# EAGLE board schematic01 (EAGLE 8.1.0)
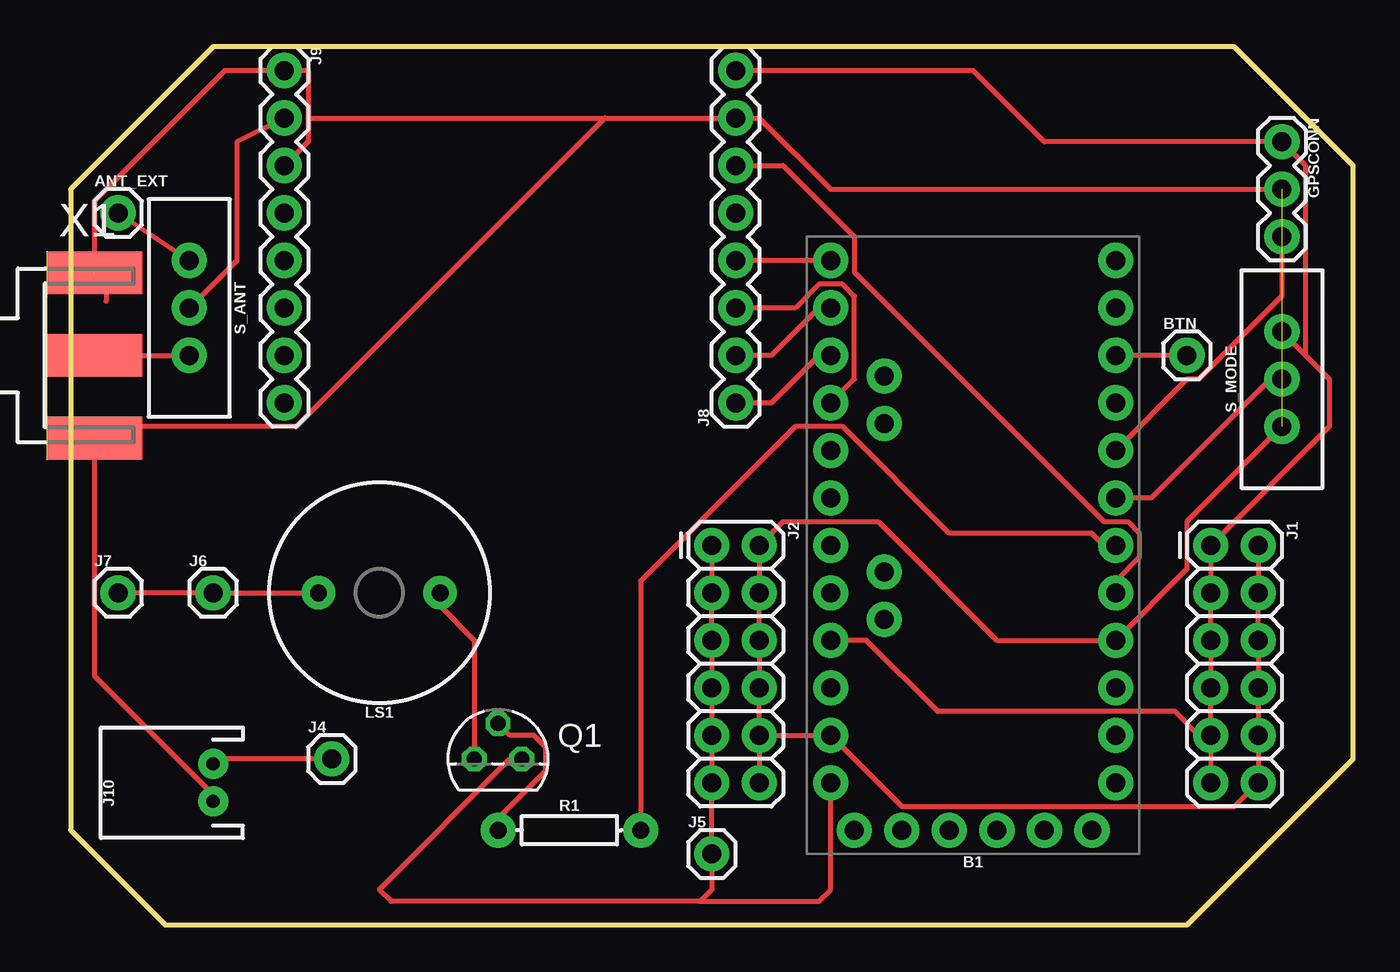
[diagram p0: board, top side]
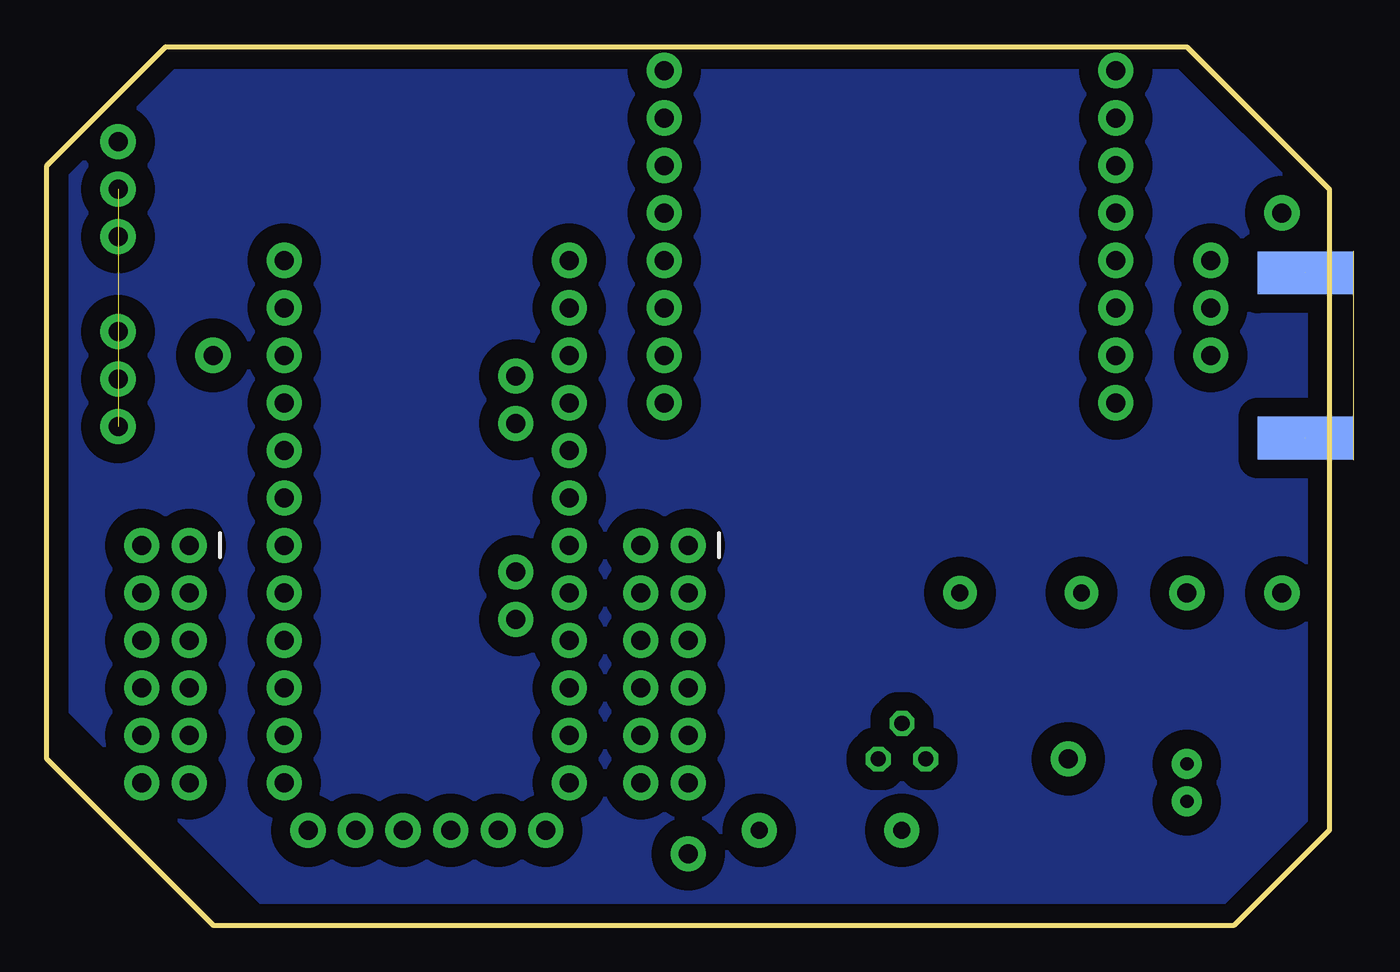
[diagram p1: board, bottom side, seen from below]

Size 68.58 x 46.99 mm. Coordinates in mm from the lower left corner, seen from the top.
Outline: 68.58,8.89 59.69,0 5.08,0 0,5.08 0,39.37 7.62,46.99 62.23,46.99 68.58,40.64 68.58,8.89
Copper layers (1*16): Top 0.035mm / dielectric 1.5mm / Bottom 0.035mm
Design rules "default": minimum track width 10mil, minimum drill 24mil, track to track 8mil, track to pad 8mil, pad to pad 8mil, via to via 8mil, smd to smd 8mil, copper to edge 40mil, drill to drill 8mil, minimum pad ring 10mil, minimum via ring 8mil, stop-mask expansion 4mil, vias tented up to drill 0mil, thermal gap 10mil

## Footprints (pad centres in the part's own frame; a part is rotated, then mirrored left to right if it is on the bottom)
1X01 = drill 1.016 pad 1.88: 1 0,0
ARDUINO_PRO_MINI = drill 1.016 pad 1.88: 1 -7.62,12.7; 2 -7.62,10.16; 3 -7.62,7.62; 4 -7.62,5.08; 5 -7.62,2.54; 6 -7.62,0; 7 -7.62,-2.54; 8 -7.62,-5.08; 9 -7.62,-7.62; 10 -7.62,-10.16; 11 -7.62,-12.7; 12 -7.62,-15.24; 13 7.62,-15.24; 14 7.62,-12.7; 15 7.62,-10.16; 16 7.62,-7.62; 17 7.62,-5.08; 18 7.62,-2.54; 19 7.62,0; 20 7.62,2.54; 21 7.62,5.08; 22 7.62,7.62; 23 7.62,10.16; 24 7.62,12.7; A4 4.763,1.429; A5 4.763,3.969; A6 4.763,-9.049; A7 4.763,-6.509; BLK -6.35,15.24; GND -3.81,15.24; GRN 6.35,15.24; RXI 1.27,15.24; TXO 3.81,15.24; VCC -1.27,15.24
1X03 = drill 1.016 pad 1.88: 1 0,0; 2 2.54,0; 3 5.08,0
2X6 = drill 1.016 pad 1.88: 1 0,0; 2 0,2.54; 3 2.54,0; 4 2.54,2.54; 5 5.08,0; 6 5.08,2.54; 7 7.62,0; 8 7.62,2.54; 9 10.16,0; 10 10.16,2.54; 11 12.7,0; 12 12.7,2.54
1X08 = drill 1.016 pad 1.88: 1 0,0; 2 2.54,0; 3 5.08,0; 4 7.62,0; 5 10.16,0; 6 12.7,0; 7 15.24,0; 8 17.78,0
JST-2-PTH = drill 0.7 pad 1.6: 1 -1,0; 2 1,0
BUZZER-12MM = drill 0.9 pad 1.778: + 3.25,0; - -3.25,0
TO92 = drill 0.813 octagon: 1 1.27,0; 2 0,1.905; 3 -1.27,0
AXIAL-0.3 = drill 0.9 pad 1.88: P$1 -3.81,0; P$2 3.81,0
SWITCH_SPDT_PTH_11.6X4.0MM = drill 1.016 pad 1.88: 1 0,2.54; 2 0,0; 3 0,-2.54
J502-ND-142-0701-851/861 = smd 5.08 x 2.286: 1 2.565,0; G@1 2.565,4.42; G@2 2.565,-4.42 | smd 5.08 x 2.286 bottom: G@3 2.565,4.42; G@4 2.565,-4.42

## Placement (x,y rotation side)
ANT_EXT  [1X01]  2.54,38.1 0 top
B1  ARDUINO_PRO_MINI  [ARDUINO_PRO_MINI]  48.26,20.32 180 top
BTN  [1X01]  59.69,30.48 0 top
FRAME1  FRAME-LETTER  [CREATIVE_COMMONS]  -101.6,69.85 0 top  (outside the outline)
GPSCONN  [1X03]  64.77,41.91 270 top
J1  2X6 FEMALE  [2X6]  60.96,20.32 270 top
J2  2X6 FEMALE  [2X6]  34.29,20.32 270 top
J4  [1X01]  13.97,8.89 0 top
J5  [1X01]  34.29,3.81 0 top
J6  [1X01]  7.62,17.78 0 top
J7  [1X01]  2.54,17.78 0 top
J8  [1X08]  35.56,27.94 90 top
J9  [1X08]  11.43,45.72 270 top
J10  [JST-2-PTH]  7.62,7.62 90 top
LS1  BUZZER-PTH  [BUZZER-12MM]  16.51,17.78 180 top
Q1  2N3906  [TO92]  22.86,8.89 0 top
R1  10k  [AXIAL-0.3]  26.67,5.08 0 top
S_ANT  [SWITCH_SPDT_PTH_11.6X4.0MM]  6.35,33.02 180 top
S_MODE  [SWITCH_SPDT_PTH_11.6X4.0MM]  64.77,29.21 0 top
X1  SMA-142-0701-851/861  [J502-ND-142-0701-851/861]  -1.27,30.48 0 top

## Library data of the parts
ANT_EXT BTN GPSCONN J4-J7 = SparkFun-Connectors
B1 = SparkFun-Boards
FRAME1 = SparkFun-Aesthetics
J1 J2 = SparkFun-Connectors; PROD_ID: CONN-12423
J8 J9 = SparkFun-Connectors; PROD_ID: CONN-08438
J10 = SparkFun-Connectors; PROD_ID: CONN-09863; SKU: PRT-09914
LS1 = SparkFun-Electromechanical; PROD_ID: COMP-08253; SF_SKU: COM-07950
Q1 = transistor-pnp
R1 = SparkFun-Resistors; PROD_ID: RES-08375
S_ANT S_MODE = SparkFun-Switches; PROD_ID: SWCH-08261; SF_SKU: COM-00102
X1 = con-coax; MF: JOHNSON COMPONENTS; MPN: 142-0701-851; OC_FARNELL: 1019325; OC_NEWARK: 99F6798

## Nets
ANT: J9.2 S_ANT.2
DIO0: B1.5 J8.6
MISO: B1.15 J8.1
MOSI: B1.14 J8.2
N$1: B1.8 GPSCONN.3
N$2: B1.7 S_MODE.2
N$3: LS1.- Q1.3
N$5: Q1.2 R1.P$1
N$7: ANT_EXT.1 S_ANT.3
N$8: S_ANT.1 X1.1
N$9: B1.10 BTN.1
N$10: J4.1 J10.2
N$11: J6.1 J7.1 LS1.+
NSS: B1.13 J8.4
POLY: B1.4 B1.23 GPSCONN.2 J1.2 J1.4 J1.6 J1.8 J1.10 J1.12 J2.2 J2.4 J2.6 J2.8 J2.10 J2.12 J8.7 J9.1 J9.3 J10.1 S_MODE.3 X1.G@1 X1.G@2 X1.G@3 X1.G@4
RAW: B1.24 J2.1 J2.3 J2.5 J2.7 J2.9 J2.11 J5.1 Q1.1
SCK: B1.16 J8.3
SPKR: B1.6 R1.P$2
VCC: B1.21 GPSCONN.1 J1.1 J1.3 J1.5 J1.7 J1.9 J1.11 J8.8 S_MODE.1

## Tracks (layer width: path | path; a pad name or v marks a point on that pad's centre or on a via)
ANT
  Top 0.254: S_ANT.2 8.89,35.56 8.89,41.91 J9.2
DIO0
  Top 0.254: B1.5 55.88,18.41 57.15,19.68 57.15,20.95 56.52,21.59 55.24,21.59 41.91,34.93 41.91,36.83 38.1,40.64 J8.6 36.2,40.64
GND
  pour Bottom (isolate 1.016): 1.27,5.08 1.27,39.37 7.62,45.72 62.23,45.72 67.31,40.64 67.31,11.43 57.15,1.27 5.08,1.27
MISO
  Top 0.254: J8.1 37.47,27.94 40.01,30.48 B1.15
MOSI
  Top 0.254: J8.2 37.47,30.48 40.01,33.02 B1.14
N$1
  Top 0.254: B1.8 59.69,29.21 60.33,29.21 64.77,33.66 GPSCONN.3
N$2
  Top 0.254: B1.7 57.78,22.86 64.14,29.21 S_MODE.2
N$3
  Top 0.254: Q1.3 21.59,15.24 19.68,17.14 19.68,17.78 LS1.-
N$5
  Top 0.254: Q1.2 23.5,10.16 24.77,10.16 25.4,9.53 25.4,8.26 22.86,5.71 R1.P$1
N$7
  Top 0.254: S_ANT.3 ANT_EXT.1
N$8
  Top 0.254: X1.1 S_ANT.1
N$9
  Top 0.254: BTN.1 B1.10
N$10
  Top 0.254: J4.1 7.62,8.89 J10.2
N$11
  Top 0.254: LS1.+ J6.1 J7.1
NSS
  Top 0.254: B1.13 J8.4
POLY  (3 unrouted)
  Top 0.254: J10.1 7.62,6.98 1.27,13.33 1.27,26.04 X1.G@4 1.91,26.67 12.06,26.67 28.57,43.18 | 1.91,33.38 1.91,34.29 X1.G@3 1.27,34.93 1.27,38.74 8.26,45.72 J9.1 12.7,45.72 12.7,43.18 | J9.3 12.7,41.91 12.7,43.18 | 12.7,43.18 28.57,43.18 | 28.57,43.18 J8.7 36.83,43.18 40.64,39.37 GPSCONN.2 | S_MODE.3 59.69,21.59 59.69,19.05 B1.4 49.53,15.24 43.18,21.59 38.1,21.59 J2.2 J2.4 J2.6 J2.8 J2.10 | J1.2 J1.4 J1.6 J1.8 J1.10 J1.12 62.23,6.35 44.45,6.35 B1.23 J2.10 | J2.10 J2.12
RAW
  Top 0.254: J2.1 J2.3 J2.5 J2.7 J2.9 J2.11 J5.1 34.29,1.91 33.66,1.27 | Q1.1 23.5,8.89 16.51,1.91 17.14,1.27 33.66,1.27 | B1.24 40.64,1.91 40.01,1.27 33.66,1.27
SCK
  Top 0.254: J8.3 38.73,33.02 40.01,34.29 41.27,34.29 41.91,33.66 41.91,29.21 B1.16
SPKR
  Top 0.254: R1.P$2 30.48,18.41 38.73,26.67 41.27,26.67 46.99,20.95 54.61,20.95 55.24,20.32 B1.6
VCC
  Top 0.254: B1.21 42.55,15.24 46.35,11.43 59.05,11.43 60.33,10.16 J1.9 | J1.9 J1.11 | J1.9 J1.7 J1.5 J1.3 J1.1 67.31,26.67 67.31,29.21 66.04,30.48 | S_MODE.1 66.04,30.48 | 66.04,30.48 66.04,40.64 GPSCONN.1 52.07,41.91 48.26,45.72 J8.8

## Text on the board
tDocu: M Grusin